# Allegro board TinyBMS-4.brd
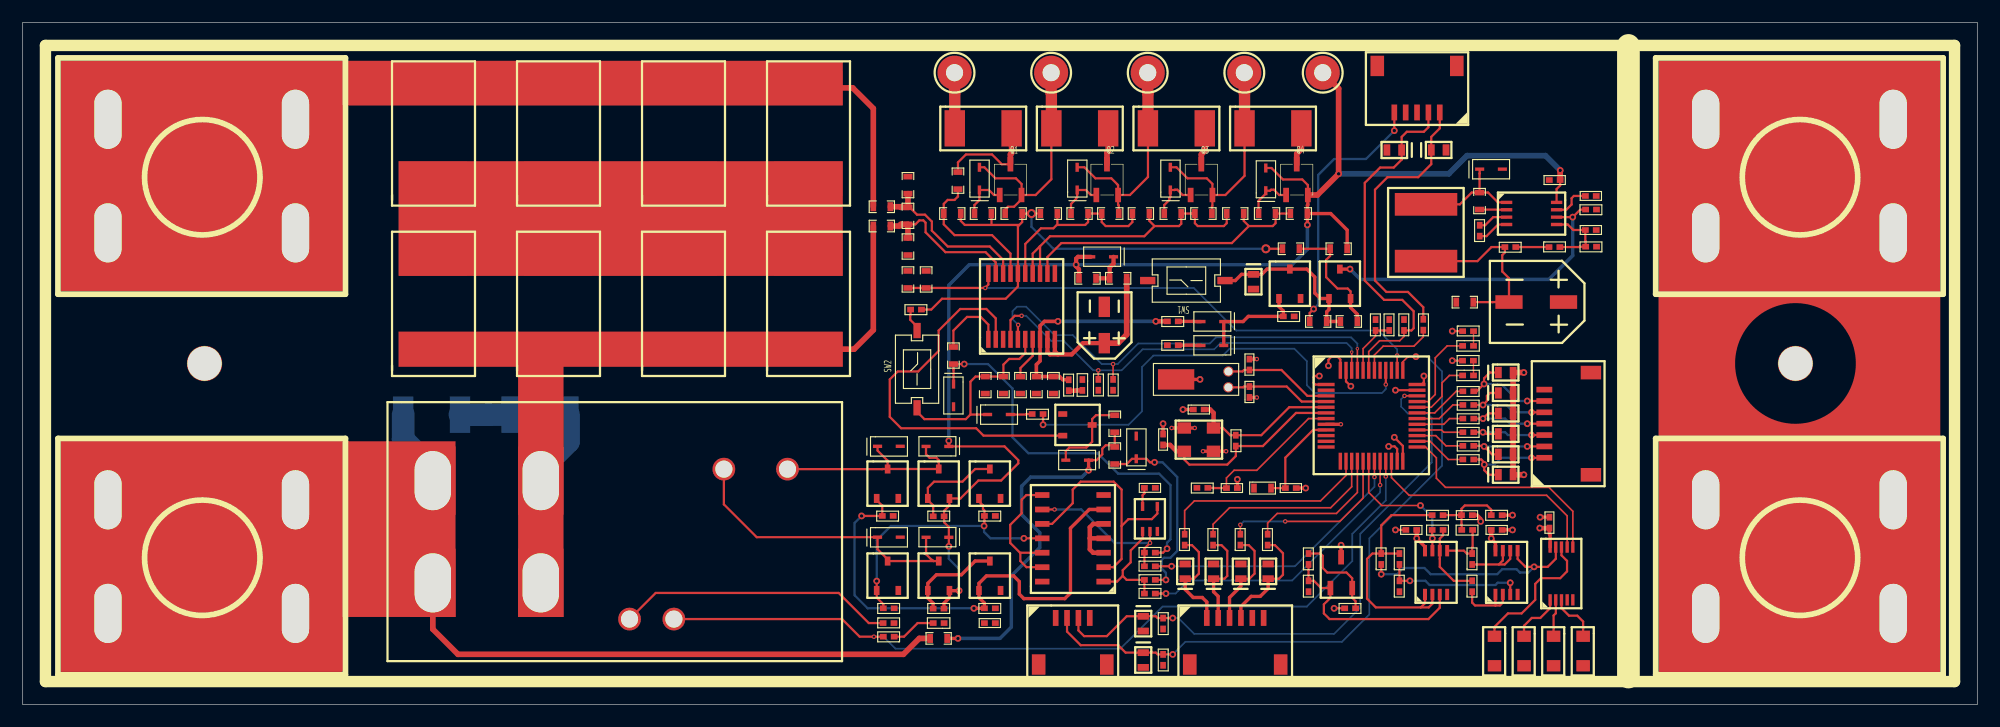
[diagram p0: board, top side]
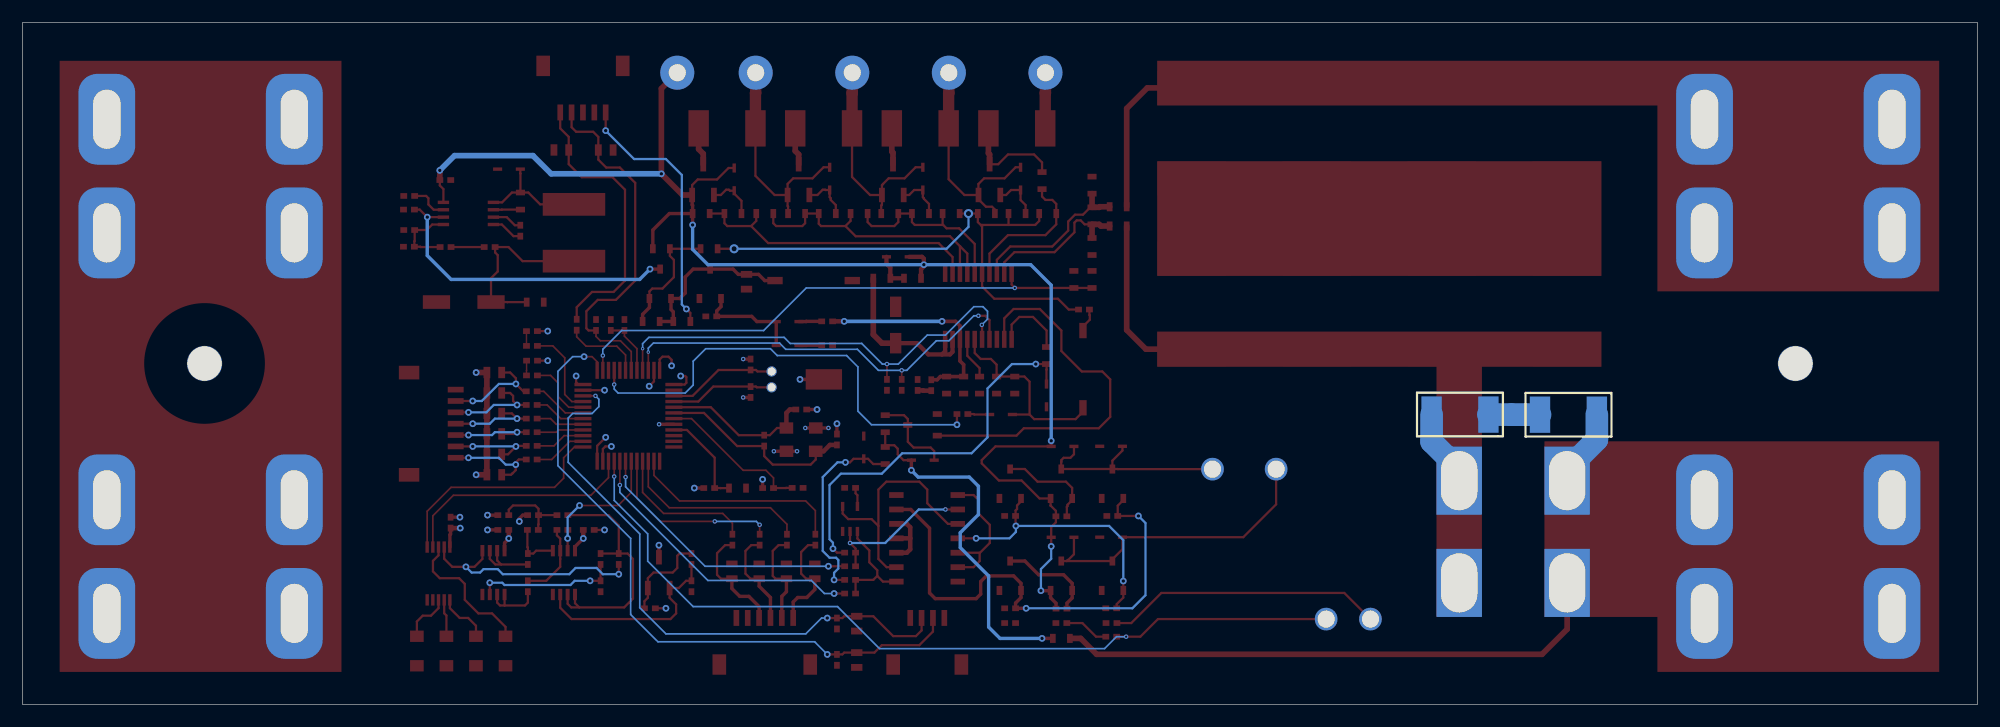
[diagram p1: board, bottom side, seen from below]

Outline 172 x 60 mm; copper layers: TOP, BOTTOM. Coordinates in mm from the lower left corner of the outline.
Outline path: 0,60 0,0 172,0 172,60 0,60

## Design rules (mm)
constraint set DEFAULT: min track width 0.127

## Placement (name value [footprint] x y rotation side)
C1  0.1uF  [C0402]  135.31 46.4 180 top
C2  0.1uF  [C0603]  77.5 46.5 270 top
C3  0.1uF  [C0402]  137.5 44.5 0 top
C4  0.1uF  [C0603]  127.8 45.1 270 top
C5  1uF  [C0603]  82.6 43.6 180 top
C6  1uF  [C0603]  91.1 43.6 180 top
C7  1uF  [C0603]  99.2 43.6 180 top
C8  1uF  [C0603]  107.5 43.6 180 top
C9  0.1uF  [C0603]  77.5 43.8 270 top
C10  0.1uF  [C0402]  137.5 41.5 0 top
C11  0.1uF  [C0603]  77.5 41.1 270 top
C12  470pF  [C0603]  79.9 36.6 90 top
C13  100uF/16V  [SMD-CAP-D6D3XL5D4MM]  133.2 35.4 180 top
C14  10uF/35V  [SMD-CAP-D4XL5D4MM]  95.2 33.4 90 top
C15  12pF  [C0402]  107.7 30.4 270 top
C16  470pF  [C0603]  84.3 28.9 270 top
C17  1uF/16V  [C0603]  87.4 28.9 270 top
C18  10uF/6.3V  [C0603]  88.8 28.9 270 top
C19  12pF  [C0402]  108.2 27 90 top
C20  12pF  [C0402]  103 25.7 0 top
C21  12pF  [C0402]  100.1 23.8 270 top
C22  0.1uF  [C0402]  98.7 18.8 0 top
C23  0.1uF  [C0402]  106.9 19.28 180 top
C24  0.1uF  [C0402]  111.1 18.78 0 top
C25  0.1uF  [C0402]  126.6 16.4 0 top
C26  0.1uF  [C0402]  134.6 15.5 90 top
C27  0.1uF  [C0402]  121.7 15.1 0 top
C28  0.1uF  [C0402]  130.2 15.6 180 top
C29  0.1uF  [C0402]  85.6 7.4 180 top
C30  DNP  [R2512]  36 25.5 180 bottom
D1  LTVS16H5.0T5G  [DFN1610-2]  120.7 48.8 180 top
D2  LTVS16H5.0T5G  [DFN1610-2]  124.6 48.79 0 top
D3  NSR0340HT1G  [SOD-323]  129.2 47.1 0 top
D4  SD05-7  [SOD-323]  84.2 46.26 90 top
D5  SD05-7  [SOD-323]  92.8 46.26 90 top
D6  SD05-7  [SOD-323]  101 46.26 90 top
D7  SD05-7  [SOD-323]  109.4 46.2 90 top
D8  1N4148WS  [SOD-323]  95 39.4 180 top
D9  LTVS16H5.0T5G  [DFN1610-2]  108.3 37.2 270 top
D10  1N4148WS  [SOD-323]  104.7 33.7 180 top
D11  1N4148WS  [SOD-323]  104.7 31.6 180 top
D12  LED  [LED0402]  126.7 31.3 0 top
D13  LTVS16H5.0T5G  [DFN1610-2]  130.5 29.2 0 top
D14  LED  [LED0402]  126.7 28.7 0 top
D15  LED  [LED0402]  93 28.6 270 top
D16  LTVS16H5.0T5G  [DFN1610-2]  130.5 27.4 0 top
D17  MM3Z4V7T1G  [SOD-323]  81.9 27.2 270 top
D18  LTVS16H5.0T5G  [DFN1610-2]  130.5 25.6 0 top
D19  1N4148WS  [SOD-323]  85.9 25.5 0 top
D20  LTVS16H5.0T5G  [DFN1610-2]  130.5 23.8 0 top
D21  1N4148WS  [SOD-323]  76.22 22.7 0 top
D22  1N4148WS  [SOD-323]  80.5 22.71 180 top
D23  MM3Z4V7T1G  [SOD-323]  98 22.6 90 top
D24  LTVS16H5.0T5G  [DFN1610-2]  130.5 22 0 top
D25  1N4148WS  [SOD-323]  92.8 21.5 180 top
D26  LTVS16H5.0T5G  [DFN1610-2]  130.5 20.2 0 top
D27  1N4148WS  [SOD-323]  76.22 14.7 0 top
D28  1N4148WS  [SOD-323]  80.5 14.71 180 top
D29  LTVS16H5.0T5G  [DFN1610-2]  102.3 11.7 90 top
D30  LTVS16H5.0T5G  [DFN1610-2]  104.8 11.7 90 top
D31  LTVS16H5.0T5G  [DFN1610-2]  107.2 11.7 90 top
D32  LTVS16H5.0T5G  [DFN1610-2]  109.6 11.7 90 top
D33  LED  [LED0402]  81.09 7.4 180 top
D34  LTVS16H5.0T5G  [DFN1610-2]  98.6 7.1 270 top
D35  LTVS16H5.0T5G  [DFN1610-2]  98.6 3.9 270 top
J1  Header1x5  [SMD-HOR-SH1D0-5P]  124.7 52.1 180 top
J2  -  [MFX04645]  7.5 51.5 0 top
J3  -  [MFX04645]  148.1 51.5 0 top
J4  Header1x7  [SMD-HOR-SH1D0-7P]  133.9 21.7 90 top
J5  -  [MFX04645]  7.5 18 0 top
J6  -  [MFX04645]  148.1 18 0 top
J7  Header1x4  [SMD-HOR-SH1D0-4P]  90.9 7.6 0 top
J8  Header1x6  [SMD-HOR-SH1D0-6P]  104.2 7.6 0 top
L1  CD54/68uH  [SMD-IND-6X6X4D4MM]  123.5 41.6 270 top
L2  4.7uH  [L0603]  108.3 18.63 0 top
NOREF  -  [unnamed]  16 30 0 top
NOREF#2  -  [#2]  57.35 20.71 0 top
NOREF#3  -  [#2]  36.09 10.69 90 top
NOREF#4  -  [#2]  69.33 4.2 90 top
NOREF#5  -  [#2]  16 30 0 top
NOREF#6  -  [#2]  45.55 9.86 0 top
NOREF#7  -  [#2]  61.65 20.71 0 top
NOREF#8  -  [#2]  36.09 19.69 0 top
NOREF#9  -  [unnamed]  156 30 0 top
NOREF#10  -  [#2]  69.3 7.45 90 top
NOREF#11  -  [#2]  32.5 9.86 0 top
NOREF#12  -  [#2]  36.05 9.86 0 top
NOREF#13  -  [#2]  53.35 9.86 0 top
Q1  FH3400C  [SOT-23-3]  85.5 44.4 0 top
Q2  FH3400C  [SOT-23-3]  94 44.4 0 top
Q3  FH3400C  [SOT-23-3]  102.3 44.4 0 top
Q4  FH3400C  [SOT-23-3]  110.7 44.4 0 top
Q5  FH3400C  [SOT-23]  111.5 37 0 top
Q6  FH3415C+  [SOT-23]  115.9 37 0 top
Q7  FH3415C+  [SOT-23]  92.8 24.6 270 top
Q8  FH3400C  [SOT-23]  76.1 19.4 0 top
Q9  FH3415C+  [SOT-23]  80.6 19.4 0 top
Q10  FH3400C  [SOT-23]  85.1 19.4 0 top
Q11  FH3400C  [SOT-23]  76.1 11.3 0 top
Q12  FH3415C+  [SOT-23]  80.6 11.3 0 top
Q13  FH3400C  [SOT-23]  85.1 11.3 0 top
R1  39  [R2512]  84.5 50.7 0 top
R2  39  [R2512]  93 50.7 0 top
R3  39  [R2512]  101.5 50.7 0 top
R4  39  [R2512]  110 50.7 0 top
R5  3mR/5W  [LVS3920-1050]  36.1 50.2 90 top
R6  3mR/5W  [LVS3920-1050]  47.1 50.2 90 top
R7  3mR/5W  [LVS3920-1050]  58.1 50.2 90 top
R8  3mR/5W  [LVS3920-1050]  69.1 50.2 90 top
R9  1K  [R0603]  81.9 46.9 270 top
R10  100  [R0603]  74.8 43.4 0 top
R11  100K  [R0402]  138.5 43.8 180 top
R12  10K  [R0603]  83.7 42.8 0 top
R13  1K  [R0603]  86.4 42.8 0 top
R14  10K  [R0603]  92.2 42.8 0 top
R15  1K  [R0603]  96.5 43.6 180 top
R16  10K  [R0603]  100.4 42.8 0 top
R17  1K  [R0603]  104.7 43.6 180 top
R18  10K  [R0603]  108.7 42.8 0 top
R19  1K  [R0603]  113.1 43.6 180 top
R20  100  [R0603]  74.8 41.7 0 top
R21  100K  [R0402]  128.47 41.2 90 top
R22  1K  [R0402]  134.3 40 0 top
R23  10K  [R0402]  138.5 40.53 180 top
R24  2K  [R0402]  131.4 40.5 180 top
R25  0  [R0603]  112.4 40.5 180 top
R26  DNP  [R0603]  115 39.7 0 top
R27  1K  [R0603]  92.9 37.1 0 top
R28  100  [R0603]  95.6 37.1 0 top
R29  1M  [R0603]  77.5 38.2 270 top
R30  0  [R0603]  126.1 35 0 top
R31  3mR/5W  [LVS3920-1050]  36.1 35.2 90 top
R32  3mR/5W  [LVS3920-1050]  47.1 35.2 90 top
R33  3mR/5W  [LVS3920-1050]  58.1 35.2 90 top
R34  3mR/5W  [LVS3920-1050]  69.1 35.2 90 top
R35  10K  [R0402]  79.1 35 180 top
R36  100K  [R0402]  111.9 34.4 180 top
R37  100  [R0603]  114.8 34.1 180 top
R38  100K  [R0603]  115.9 33.3 0 top
R39  DNP  [R0402]  101.7 33.96 180 top
R40  0  [R0402]  119.3 32.9 90 top
R41  DNP  [R0402]  120.5 32.9 90 top
R42  10K  [R0402]  121.8 32.9 90 top
R43  1K  [R0402]  123 33.9 270 top
R44  2K  [R0402]  126.7 32.6 0 top
R45  100  [R0402]  101.7 31.86 180 top
R46  2.2K  [R0603]  82.3 29.9 90 top
R47  2K  [R0402]  126.69 30 0 top
R48  10K  [R0402]  94.4 28.61 270 top
R49  10K  [R0402]  95.7 28.61 270 top
R50  DNP  [R0603]  91.1 27.3 90 top
R51  2K  [R0402]  92.3 27.6 90 top
R52  1K  [R0402]  127.7 27.8 180 top
R53  1K  [R0402]  127.7 26.6 180 top
R54  10K  [R0402]  89.8 25.8 180 top
R55  1K  [R0402]  127.7 25.4 180 top
R56  1M  [R0603]  96.5 23.9 90 top
R57  1K  [R0402]  127.7 24.2 180 top
R58  1M  [R0402]  106.5 23.7 270 top
R59  1K  [R0402]  127.7 23 180 top
R60  2.2K  [R0603]  96.5 21.1 90 top
R61  1K  [R0402]  127.7 21.8 180 top
R62  10K  [R0402]  104.3 19.3 180 top
R63  15.1K  [R0402]  125 16.9 180 top
R64  15.1K  [R0402]  130.2 16.9 180 top
R65  100K  [R0402]  76.61 16.83 180 top
R66  47K  [R0402]  80.11 16.3 0 top
R67  100K  [R0402]  85.6 16.83 180 top
R68  237K  [R0402]  125 15.6 180 top
R69  237K  [R0402]  127.6 15.6 180 top
R70  1K  [R0402]  102.5 14 90 top
R71  1K  [R0402]  105 14 90 top
R72  1K  [R0402]  107.4 14 90 top
R73  1K  [R0402]  109.8 14 90 top
R74  DNP  [R0402]  98.7 13.1 0 top
R75  0  [R0402]  113.4 12.3 90 top
R76  2.15K  [R0402]  119.8 12.3 90 top
R77  2.15K  [R0402]  121.4 12.3 90 top
R78  10K  [R0402]  127.8 12.3 90 top
R79  1K  [R0402]  98.7 11.9 0 top
R80  DNP  [R0402]  98.7 10.7 0 top
R81  DNP  [R0402]  113.4 9.9 90 top
R82  100  [R0402]  121.4 9.9 90 top
R83  10K  [R0402]  127.8 9.9 90 top
R84  1K  [R0402]  98.7 9.5 0 top
R85  100K  [R0402]  76.7 8.7 180 top
R86  47K  [R0402]  80.1 8.17 0 top
R87  100K  [R0402]  85.6 8.7 180 top
R88  365  [R0402]  117.3 8.7 180 top
R89  0  [R0402]  75.7 6.9 0 top
R90  10K  [R0402]  100.1 7.6 270 top
R91  2K  [R0402]  76.7 6.2 180 top
R92  1M  [R0603]  79.8 5.4 0 top
R93  PT100  [R1210]  129.5 4.7 270 top
R94  PT100  [R1210]  132.1 4.7 270 top
R95  PT100  [R1210]  134.7 4.7 270 top
R96  PT100  [R1210]  137.3 4.7 270 top
R97  10K  [R0402]  100.1 4.4 270 top
R98  DNP  [R2512]  45.5 25.5 0 bottom
RL1  -  [HF197F-110]  52.1 15.2 0 top
RV1  10K  [R0603]  85.9 28.9 270 top
SW1  BUTTON  [SW-SMD-3D0X6D0-2P]  102.4 37.3 180 top
SW2  BUTTON  [SW-SMD-3D0X6D0-2P]  78.7 29.5 90 top
TP1  BAT-  [TP_THR_CIR_3D0_1D5]  82 55.6 0 top
TP2  SOLDERING  [TP_THR_CIR_3D0_1D5]  90.5 55.6 0 top
TP3  SOLDERING  [TP_THR_CIR_3D0_1D5]  99 55.6 0 top
TP4  SOLDERING  [TP_THR_CIR_3D0_1D5]  107.5 55.6 0 top
TP5  BAT+  [TP_THR_CIR_3D0_1D5]  114.4 55.6 0 top
U1  LM5007MM  [VSSOP-8]  132.8 43.2 270 top
U2  BQ7692003PWR  [TSSOP-20]  87.9 35 90 top
U3  STM32F103CBT6  [LQFP-48]  118.7 25.4 270 top
U4  SN74AUP1G00DCKR  [SC-70-5]  99.19 16.3 0 top
U5  SN74F00DR  [SOIC-14]  95.52 10.2 90 top
U6  TL431  [SOT-23-3-TL431]  114.6 9.8 0 top
U7  XLV358-MS  [MSOP-8]  123.4 13.28 0 top
U8  XLV358-MS  [MSOP-8]  129.6 13.28 0 top
U9  RS2255XN  [MSOP-10]  135.4 11.5 0 top
Y1  32.768KHz  [DT-26]  106.1 29.3 270 top
Y2  8MHz  [SMD3225-4P]  103.5 23.3 0 top

## Library data of the parts
C1-C13 C15-C30 = CAP NP
C14 = CAP POL
D1 D2 D9 D13 D16 D18 D20 D24 D26 D29-D32 D34 D35 = DIODE TVS
D3 D8 D10 D11 D19 D21 D22 D25 D27 D28 = DIODE
D4-D7 = DIODE SCHOTTKY
D12 D14 D15 D33 = LED
D17 D23 = DIODE ZENER
J1 = Header1x5
J2 J3 J5 J6 = MFX04645
J4 = Header1x7
J7 = Header1x4
J8 = Header1x6
L1 L2 = INDUCTOR
Q1-Q4 Q6 Q7 Q9 Q12 = BSS84
Q5 Q8 Q10 Q11 Q13 = FH3400C
R1-R98 = R
RL1 = Relay
RV1 = VARISTOR
SW1 SW2 = SW PUSHBUTTON
TP1-TP5 = T POINT F
U1 = LM5007MM
U2 = BQ7692003PWR
U3 = STM32F103CBT6
U4 = SN74AUP1G00DCKR
U5 = SN74F00DR
U6 = TL431/TI
U7 U8 = XLV358-MS
U9 = RS2255XN
Y1 = CRYSTAL-2P
Y2 = CRYSTAL

## Footprints (pads in the part's own frame, mm; a bottom-side part is the same pattern mirrored in y, then rotated)
C0402
  rect 0.6x0.5 smd: 1(0.01,0.25) 2(0.97,0.25)
C0603
  rect 0.5x0.8 smd: 1(0.05,0.4) 2(1.55,0.4)
DFN1610-2
  rect 0.6x1 smd: 1(-0.647,0.006) 2(0.653,0.006)
DT-26
  round 0.9 hole 0.7: 1(0,0) 2(1.4,0)
  rect 1.8x3.2 smd: 3(0.7,-4.6)
HF197F-110
  round 2 hole 1.5: 1(9.6,5.5) 2(15.2,5.5) 7(1.3,-7.7) 8(5.2,-7.7)
  rect 4x6 hole 3.2x5.2: 3(-6.51,4.488) 4(-6.51,-4.512) 5(-16.01,4.488) 6(-16.01,-4.512)
L0603
  rect 0.5x0.8 smd: 1(0.05,0.4) 2(1.55,0.4)
LED0402
  rect 0.6x0.5 smd: 1(0.01,0.25) 2(0.97,0.25)
LQFP-48
  rect 0.3x1.5 smd: 1(-2.75,-4) 2(-2.25,-4) 3(-1.75,-4) 4(-1.25,-4) 5(-0.75,-4) 6(-0.25,-4) 7(0.25,-4) 8(0.75,-4) 9(1.25,-4) 10(1.75,-4) 11(2.25,-4) 12(2.75,-4) 25(2.75,4) 26(2.25,4) 27(1.75,4) 28(1.25,4) 29(0.75,4) 30(0.25,4) 31(-0.25,4) 32(-0.75,4) 33(-1.25,4) 34(-1.75,4) 35(-2.25,4) 36(-2.75,4)
  rect 1.5x0.3 smd: 13(4,-2.75) 14(4,-2.25) 15(4,-1.75) 16(4,-1.25) 17(4,-0.75) 18(4,-0.25) 19(4,0.25) 20(4,0.75) 21(4,1.25) 22(4,1.75) 23(4,2.25) 24(4,2.75) 37(-4,2.75) 38(-4,2.25) 39(-4,1.75) 40(-4,1.25) 41(-4,0.75) 42(-4,0.25) 43(-4,-0.25) 44(-4,-0.75) 45(-4,-1.25) 46(-4,-1.75) 47(-4,-2.25) 48(-4,-2.75)
LVS3920-1050
  rect 3x6 smd: 1(-3.94,-0.02) 2(4.06,-0.02)
MFX04645
  rrect 5x8 hole 2.4x5.2: 1(0,0) 2(16.5,0) 3(0,-10) 4(16.5,-10)
MSOP-8
  rect 0.35x1 smd: 1(-0.001,-3.615) 2(0.649,-3.615) 3(1.299,-3.615) 4(1.949,-3.615) 5(1.949,0.241) 6(1.299,0.241) 7(0.649,0.241) 8(-0.001,0.241)
MSOP-10
  rect 0.3x1 smd: 1(-0.99,-2.31) 2(-0.49,-2.31) 3(0.01,-2.31) 4(0.51,-2.31) 5(1.01,-2.31) 6(1.01,2.34) 7(0.51,2.34) 8(0.01,2.34) 9(-0.49,2.34) 10(-0.99,2.34)
R0402
  rect 0.6x0.5 smd: 1(0.01,0.25) 2(0.97,0.25)
R0603
  rect 0.5x0.8 smd: 1(0.05,0.4) 2(1.55,0.4)
R1210
  rect 1x1.2 smd: 1(-1.289,0.015) 2(1.311,0.015)
R2512
  rect 1.8x3.2 smd: 1(-2.48,-0.002) 2(2.52,-0.002)
SC-70-5
  rect 0.3x0.8 smd: 1(-0.646,-1.085) 2(0.004,-1.085) 3(0.654,-1.085) 4(0.654,1.115) 5(-0.646,1.115)
SMD3225-4P
  rect 1.2x1 smd: 1(-1.285,-1.028) 2(1.29,-1.026) 3(1.297,1.021) 4(-1.29,1.023)
SMD-CAP-D4XL5D4MM
  rect 1.8x1 smd: 1(-1.61,0.02) 2(1.59,0.02)
SMD-CAP-D6D3XL5D4MM
  rect 2.4x1.2 smd: 1(-2.39,-0.01) 2(2.41,-0.01)
SMD-HOR-SH1D0-4P
  rect 0.5x1.4 smd: 1(0,0) 2(1,0) 3(2,0) 4(3,0)
  rect 1.2x1.8 smd: 5(4.5,-4.1) 6(-1.5,-4.1)
SMD-HOR-SH1D0-5P
  rect 0.5x1.4 smd: 1(0,0) 2(1,0) 3(2,0) 4(3,0) 5(4,0)
  rect 1.2x1.8 smd: 6(5.5,-4.1) 7(-1.5,-4.1)
SMD-HOR-SH1D0-6P
  rect 0.5x1.4 smd: 1(0,0) 2(1,0) 3(2,0) 4(3,0) 5(4,0) 6(5,0)
  rect 1.2x1.8 smd: 7(6.5,-4.1) 8(-1.5,-4.1)
SMD-HOR-SH1D0-7P
  rect 0.5x1.4 smd: 1(0,0) 2(1,0) 3(2,0) 4(3,0) 5(4,0) 6(5,0) 7(6,0)
  rect 1.2x1.8 smd: 8(-1.5,-4.1) 9(7.5,-4.1)
SMD-IND-6X6X4D4MM
  rect 2x5.5 smd: 1(-2.41,-0.01) 2(2.59,-0.01)
SOD-323
  rect 0.8x0.3 smd: 1(-0.99,0.01) 2(1.01,0.01)
SOIC-14
  rect 0.51x1.27 smd: 1(0.6,0.4) 2(1.87,0.4) 3(3.14,0.4) 4(4.41,0.4) 5(5.68,0.4) 6(6.95,0.4) 7(8.22,0.4) 8(8.22,5.8) 9(6.95,5.8) 10(5.68,5.8) 11(4.41,5.8) 12(3.14,5.8) 13(1.87,5.8) 14(0.6,5.8)
SOT-23
  rect 0.5x0.8 smd: 1(-0.95,-1.28) 2(0.95,-1.28) 3(0.01,1.31)
SOT-23-3
  rect 0.51x1.27 smd: 1(0.476,0.434) 2(2.391,0.434) 3(1.415,3.142)
SOT-23-3-TL431
  rect 0.51x1.27 smd: 1(0.476,0.434) 2(1.415,3.142) 3(2.391,0.434)
SW-SMD-3D0X6D0-2P
  rect 1.35x0.65 smd: 1(-3.4,0) 2(3.4,0)
TP_THR_CIR_3D0_1D5
  round 3 hole 1.5: 1(0,0)
TSSOP-20
  rect 1.5x0.4 smd: 1(-2.872,2.924) 2(-2.872,2.274) 3(-2.872,1.624) 4(-2.872,0.974) 5(-2.872,0.324) 6(-2.872,-0.326) 7(-2.872,-0.976) 8(-2.872,-1.626) 9(-2.872,-2.276) 10(-2.872,-2.926) 11(2.928,-2.926) 12(2.928,-2.276) 13(2.928,-1.626) 14(2.928,-0.976) 15(2.928,-0.326) 16(2.928,0.324) 17(2.928,0.974) 18(2.928,1.624) 19(2.928,2.274) 20(2.928,2.924)
unnamed
  round 3.1 hole 3 unplated: (0,0)
VSSOP-8
  rect 0.3x1 smd: 1(-0.985,-2.22) 2(-0.335,-2.22) 3(0.315,-2.22) 4(0.965,-2.22) 5(0.965,2.18) 6(0.315,2.18) 7(-0.335,2.18) 8(-0.985,2.18)

## Nets
GND: C1.2 C2.1 C3.2 C10.2 C11.2 C12.2 C13.1 C14.2 C15.1 C16.2 C17.2 C18.2 C19.1 C20.1 C21.1 C22.2 C23.1 C24.2 C25.2 C26.2 C27.1 C28.1 C29.2 D1.2 D2.2 D3.2 D9.2 D13.2 D15.1(CATHODE) D16.2 D17.2 D18.2 D20.2 D21.2 D23.2 D24.2 D26.2 D27.2 D29.2 D30.2 D31.2 D32.2 D33.1(CATHODE) D34.2 D35.2 J1.3 J1.4 J1.6 J1.7 J2.1 J2.2 J2.3 J2.4 J4.7 J4.8 J4.9 J7.4 J7.5 J7.6 J8.5 J8.7 J8.8 Q5.2(S) Q7.1 Q8.2(S) Q10.2(S) Q11.2(S) Q13.2(S) R1.1 R5.2 R6.2 R7.2 R8.2 R10.1 R11.1 R21.1 R23.1 R29.1 R36.1 R40.2 R64.1 R65.1 R67.1 R81.1 R82.1 R85.1 R87.1 R93.2 R94.2 R95.2 R96.2 RV1.2 SW1.2 TP1.1(TP) U1.4 U2.3(VSS) U3.8 U3.23 U3.35 U3.47(VSS_3) U4.3 U5.7 U6.2 U7.4 U8.4 U9.4 U9.5 Y1.3 Y2.2 Y2.4
VDD25: R63.2 R76.2 R77.2 U7.1 U7.2
VDD33: C22.1 C26.1 C27.2 C28.2 C29.1 J7.1 L2.1 R30.1 R41.2 R42.2 R44.1 R47.1 R48.2 R49.2 R50.1 R62.2 R88.2 R89.2 R90.2 R97.2 U3.1 U3.24 U3.36 U3.48 U4.5 U5.14(VCC) U7.8 U8.8 U9.10
VDD168: C1.1 D7.2(CATHODE) D8.2 D22.1(K) D28.1(K) J3.1 J3.2 J3.3 J3.4 J6.1 J6.2 J6.3 J6.4 Q4.2(S) Q9.2(S) Q12.2(S) R19.1 R26.2 R27.1 R66.2 R86.2 TP5.1(TP) U1.8(VIN)
ADC1_IN8: R68.2 U3.18 U7.7(OUTB)
BMS_ALERT: C12.1 R29.2 U2.20 U3.38
BMS_ON: R54.1 U3.40
CHG: D23.1(CATHODE) R60.1 R80.2
CTL1: R84.2 U3.20
CTL2: R79.2 U3.19
DSG: D17.1(CATHODE) R46.1 R74.2
EXT_EN: J1.5 R37.2
HCTL1: Q8.1 Q13.1 R65.2 R87.2 U5.6
HCTL2: Q10.1 Q11.1 R67.2 R85.2 U5.11
I2C1_SCL: R49.1 U2.5 U3.45
I2C1_SDA: R48.1 U2.4 U3.46
LED0: D14.1(CATHODE) U3.32
LED1: D12.1(CATHODE) U3.33
MCU_EN: R45.2
MCU_HOLD: U3.39
REGOUT: C18.1 R39.2 R50.2 R51.2 U2.8
REL: R91.2 RL1.8 U3.21
SELA: U3.22 U9.7
SELB: U3.25 U9.6
SPI1_MISO: R73.2 U3.16
SPI1_MOSI: R72.2 U3.17
SPI1_NSS: R70.2 U3.14
SPI1_SCK: R71.2 U3.15
SWCLK: D35.1(CATHODE) J7.2 R97.1 U3.37
SWDIO: D34.1(CATHODE) J7.3 R90.1 U3.34
TIM1_CH1: R55.2 U3.29
TIM1_CH1N: R61.2 U3.26
TIM1_CH2: R53.2 U3.30
TIM1_CH2N: R59.2 U3.27
TIM1_CH3: R52.2 U3.31
TIM1_CH3N: R57.2 U3.28
USART1_RX: D1.1(CATHODE) J1.2 R42.1 U3.43
USART1_TX: R43.2 U3.42
USART2_RX: U3.13
USART2_TX: U3.12
VC1: C5.1 C6.2 R12.2 R13.2 R25.2 R35.1 U2.16
WAKE_UP: C16.1 D19.1(K) RV1.1 SW2.1 U2.6
N00153: C7.1 C8.2 R16.2 R17.2 U2.13 U2.14
N01121: D6.2(CATHODE) Q3.2(S) R4.1 R17.1 TP4.1(TP)
N02162: C2.2 C9.1 R10.2 U2.18
N02176: C9.2 C11.1 R20.2 U2.19
N02237: R20.1 R31.1 R32.1 R33.1 R34.1 R98.2 RL1.3 RL1.4
N02763: D25.1(K) R56.1 R60.2 R92.2
N03241: Q7.2(S) U2.2
N04366: R46.2 U2.1
N05476: C14.1 R28.2 U2.9 U2.10
N06945: D8.1(K) R27.2 R28.1
N07349: C17.1 U2.7
N45632: D19.2 R54.2
N60275: C4.2 U1.2
N60407: C4.1 D3.1(K) L1.1 U1.1
N60487: C13.2 L1.2 R24.2 R30.2
N60523: C3.1 U1.7
N60535: R21.2 U1.3
N60543: C10.1 R22.2 R23.2 U1.5
N60675: R22.1 R24.1
N62346: R40.1 R41.1 U3.44
N62530: C21.2 R58.2 U3.6 Y2.1
N62534: C20.2 R58.1 U3.5 Y2.3
N62538: C19.2 U3.4 Y1.2
N62542: C15.2 U3.3 Y1.1
N62840: C23.2 R62.1 U3.7
N62876: C24.1 L2.2 U3.9
N66854: D27.1(K) D28.2 Q11.3 Q12.3 RL1.1
N66902: Q12.1 Q13.3 R86.1
N72236: D21.1(K) D22.2 Q8.3 Q9.3 RL1.2
N76887: Q9.1 Q10.3 R66.1
N86420: D29.1(CATHODE) J8.1 R70.1
N86427: D30.1(CATHODE) J8.2(WR) R71.1
N86434: D31.1(CATHODE) J8.3 R72.1
N86441: D32.1(CATHODE) J8.4 R73.1
N86910: D14.2 R47.2
N86956: D12.2 R44.2
N90859: R75.2 R88.1 U6.3
N95637: R75.1 R81.2 U6.1(REF) U7.3
N97042: R77.1 R82.2 U8.3
N97046: R76.1 U8.5 U9.9
N98736: R68.1 R83.2 U7.6
N98835: R69.1 R78.2 U7.5
N100399: R78.1 U8.6 U8.7(OUTB)
N101244: R83.1 U8.1 U8.2
N105903: R93.1 U9.8
N105907: R96.1 U9.3
N105911: R94.1 U9.1
N105915: R95.1 U9.2(X3)
N115788: C25.1 R63.1 R64.2 R69.2
N129705: D25.2 Q7.3 R56.2
N129935: C30.2 J5.1 J5.2 J5.3 J5.4 R92.1 RL1.5 RL1.6
N130360: C30.1 R98.1
N133152: U5.3 U5.4 U5.5
N133196: U5.8 U5.12 U5.13
N137595: U4.4(Y) U5.2 U5.10
N137612: R80.1 R84.1 U4.1 U5.1
N137616: R74.1 R79.1 U4.2 U5.9
N140319: Q4.3 R4.2
N140441: C8.1 R18.2 R19.2 U2.12
N140869: D7.1 Q4.1 R18.1
N142766: Q3.3 R3.2
N142773: D5.2(CATHODE) Q2.2(S) R3.1 R15.1 TP3.1(TP)
N142879: D6.1 Q3.1 R16.1
N143225: D5.1 Q2.1 R14.1
N143454: C6.1 C7.2 R14.2 R15.2 U2.15
N144047: Q2.3 R2.2
N144054: D4.2(CATHODE) Q1.2(S) R2.1 R13.1 TP2.1(TP)
N144202: D4.1 Q1.1 R12.1
N144572: Q1.3 R1.2 R9.1
N144615: C5.2 R9.2 U2.17
N146314: R35.2 SW2.2
N155464: D9.1(CATHODE) Q5.3 Q6.1 R37.1 R38.1 SW1.1
N155472: Q6.3 R11.2 U1.6
N155484: Q6.2(S) R25.1 R26.1 R38.2
N160866: D10.1(K) D11.1(K) Q5.1 R36.2
N160870: D11.2 R45.1
N160997: D10.2 R39.1
N162969: D15.2 R51.1
N169622: D2.1(CATHODE) J1.1 R43.1
N232879: R5.1 R6.1 R7.1 R8.1 R31.2 R32.2 R33.2 R34.2
N240697: D33.2 R91.1
N241926: R89.1 RL1.7
N244503: D26.1(CATHODE) J4.1 R61.1
N244510: D24.1(CATHODE) J4.2 R59.1
N244517: D20.1(CATHODE) J4.3 R57.1
N244530: D18.1(CATHODE) J4.4 R55.1
N244543: D16.1(CATHODE) J4.5 R53.1
N244556: D13.1(CATHODE) J4.6 R52.1

Pads without a net: J8 6; U2 11; U3 2 10 11 41

## Via types
v1: diameter 0.4, hole 0.2, TOP to BOTTOM, 23 vias
v2: diameter 0.6, hole 0.3, TOP to BOTTOM, 74 vias
v3: diameter 0.3, hole 0.15, TOP to BOTTOM, 2 vias
v4: diameter 0.8, hole 0.45, TOP to BOTTOM, 2 vias

## Routing (per net, layer and track width the routed paths; a pad name or vN(x,y) marks a point on that pad's centre or on a via; arc(x,y) is an arc through that point)
GND: length 57
  TOP w0.2: R21.1 128.81,41.21 129.84,42.23 U1.4 ; v2(120.2,22.7) 120.73,22.7 120.95,22.48 U3.23 ; U3.35 v2(120.8,27.65) ; C27.1 v2(120.8,15.35) ; v2(116.87,28) 116.45,28.42 U3.47
  TOP w0.3: C23.1 v2(106.89,19.8) ; C19.1 v1(108.6,27.01) ; U6.2 v2(116.02,14) ; v1(105.9,22.27) Y2.2 v1(103.86,22.27) ; C21.1 v2(100.35,24.7) ; C28.1 v2(131.1,15.35) ; v2(128.3,16.1) 128.3,16.35 128,16.65 C25.2 ; U3.8 v1(116,24.65) ; v1(101.1,24.32) Y2.4 v1(103.14,24.32) ; C24.2 v2(112.9,19.03) ; C26.2 v2(133.53,16.47) ; C20.1 v2(102.1,25.95) ; R64.1 v2(131.1,16.65) ; v1(108.6,30.39) C15.1 ; Y1.3 v2(103.6,28.6)
  TOP w0.5: v2(132.1,29.21) D13.2 D16.2 D18.2 D20.2 D24.2 D26.2 v2(132.1,20.21) ; R10.1 74.85,52.45 73.04,54.26 R8.2
  TOP w1: R1.1 82.02,53.8 82,53.82 TP1.1
VDD25: length 22.2
  TOP w0.2: 123.03,8.53 123.73,8.53 124.05,8.85 U7.2 ; 123.03,8.53 119.07,8.53 118.3,9.3 118.3,12.8 118.77,13.27 R76.2 ; 123.03,8.53 123.4,8.9 U7.1 ; R76.2 R77.2 ; R76.2 119.55,15.75 120.45,16.65 R63.2
VDD33: length 19.7
  TOP w0.2: U4.5 98.55,18.41 98.71,18.57 C22.1 ; U3.36 123.1,28.15 123.3,28.35 v2(123.3,28.9) ; v2(114.9,29.8) 114.9,30.33 115.17,30.6 115.7,30.6 115.95,30.35 U3.48 ; R88.2 v2(115.4,8.45) ; v2(120.7,23.5) 121.45,22.75 U3.24 ; R44.1 v2(125.8,32.85) ; U3.1 113.75,28.15 113.6,28.3 113.6,28.8 113.7,28.9 v2(114.1,28.9) ; R47.1 v2(125.8,30.25)
  TOP w0.3: v2(122.67,14.6) 123.4,13.87 U7.8 ; C26.1 134.35,14.98 134.41,14.92 U9.10 ; v2(129.23,14.6) 129.23,14.57 129.6,14.2 U8.8
  TOP w0.4: C28.2 v2(129.23,14.6) ; C27.2 v2(122.67,14.6) ; C26.1 v2(133.5,15.51)
VDD168: length 128.4
  TOP w0.2: 81.5,22.7 86.4,22.7 87.61,21.49 87.61,21.21 86.1,19.7 84.1,19.7 82.52,18.12 Q9.2 81.55,17.49 81.54,17.48 81.54,17.48 81.08,17.03 R66.2 81.08,16.02 81.5,15.6 v2(81.5,13.9) ; D7.2 109.89,47.21 110.9,46.2 112.6,46.2 113.09,45.71 Q4.2 ; U1.8 134.98,45.36 135.29,45.67 C1.1
  TOP w0.3: v2(113.05,42.2) R19.1 ; R19.1 113.05,43.93 113.09,43.97 Q4.2 ; R19.1 115.1,43.2 116.55,41.75 R26.2 ; v2(82.4,10) 81.57,10 Q12.2 81.55,9.38 81.07,8.9 R86.2 ; 81.5,22.7 v2(81.5,23.2)
  TOP w0.38: R27.1 92.95,38.3 92.7,38.55 v2(92.7,38.7) 92.7,39.23 92.86,39.39 D8.2
  TOP w0.5: Q4.2 113.93,44.83 v2(115.8,46.7) 115.8,54.2 TP5.1 ; v2(135.3,47) 135.29,46.99 C1.1
  BOTTOM w0.2: v2(81.5,13.9) 81.5,12.8 82.4,11.9 v2(82.4,10)
  BOTTOM w0.3: v2(113.05,42.2) 113.05,40.05 111.7,38.7 v2(92.7,38.7) 83.3,38.7 81.5,36.89 v2(81.5,23.2)
  BOTTOM w0.5: v2(115.8,46.7) 125.5,46.7 127.1,48.3 134,48.3 v2(135.3,47)
ADC1_IN8: length 12.9
  TOP w0.15: U3.18 118.45,18.65 119.6,17.5 v2(123,17.5)
  TOP w0.2: R68.2 124.03,14.87 124.05,14.85 v2(124.05,14.6) U7.7
  BOTTOM w0.2: v2(123,17.5) 124.05,16.45 v2(124.05,14.6)
BMS_ALERT: length 48.5
  TOP w0.15: v1(120.95,30.7) U3.38
  TOP w0.2: R29.2 C12.1 v1(84.7,36.65) 84.7,36.67 84.98,36.95 U2.20
  BOTTOM w0.15: v1(84.7,36.65) 103.05,36.65 106.8,32.9 119.3,32.9 120.95,31.25 v1(120.95,30.7)
BMS_ON: length 40.8
  TOP w0.2: v1(119.95,28.15) U3.40 ; R54.1 v2(89.79,24.61)
  BOTTOM w0.15: v1(119.95,28.15) 119.95,27.75 119.6,27.4 113.7,27.4 113,28.1 113,30.2 111.9,31.3 106.2,31.3 105.6,30.7 99.5,30.7 98.5,29.7 98.5,25.8 97.31,24.61 v2(89.79,24.61)
CHG: length 17.4
  TOP w0.2: v2(99.6,21.3) 99.2,21.3 98.89,21.61 D23.1 97.61,21.61 97.15,21.15 R60.1 ; R80.2 v2(100.6,10.95)
  BOTTOM w0.2: v2(99.6,21.3) 100.3,21.3 101.6,20 101.6,13.5 101,12.9 100.43,12.9 100.23,12.7 100.23,11.95 100.6,11.58 v2(100.6,10.95)
CTL1: length 26.2
  TOP w0.15: U3.20 v1(119.45,19.3)
  TOP w0.2: R84.2 v2(100.6,9.75)
  BOTTOM w0.15: v2(100.6,9.75) 101.45,9.75 102.6,10.9 111.7,10.9 119.45,18.65 v1(119.45,19.3)
CTL2: length 24.4
  TOP w0.15: U3.19 v1(118.95,20)
  TOP w0.2: R79.2 v2(101.1,12.15)
  BOTTOM w0.15: v1(118.95,20) 118.95,19.15 111.95,12.15 v2(101.1,12.15)
DSG: length 34.7
  TOP w0.2: v2(82.85,29.95) R46.1 81.9,29.47 81.91,29.46 D17.1 ; v2(100.7,13.7) 100.35,13.35 R74.2
  BOTTOM w0.2: v2(100.7,13.7) 100.7,14.23 101,14.53 101,19.3 100,20.3 96.4,20.3 94.6,22.1 88.5,22.1 87.1,23.5 87.1,27.8 84.95,29.95 v2(82.85,29.95)
EXT_EN: length 23.1
  TOP w0.2: R37.2 113.25,34.45 v2(113.6,34.8) ; v2(120.7,50.5) J1.5
  BOTTOM w0.2: v2(113.6,34.8) 114,35.2 114,46.6 115.4,48 118.2,48 v2(120.7,50.5)
HCTL1: length 44.4
  TOP w0.2: Q8.1 75.15,17.97 75.64,17.48 R65.2 v2(73.82,16.58)
  TOP w0.3: v2(83.7,8.45) R87.2 84.63,8.91 84.15,9.39 Q13.1 84.15,10.65 84.8,11.3 87.2,11.3 87.7,10.8 87.7,9.7 88.1,9.3 91.7,9.3 92.2,9.8 92.2,15.5 93.85,17.15 U5.6
  BOTTOM w0.2: v2(73.82,16.58) 73.2,15.96 73.2,9.6 74.35,8.45 v2(83.7,8.45)
HCTL2: length 24.7
  TOP w0.2: v2(75.15,10.85) Q11.1 75.15,9.39 75.73,8.81 R85.2 ; Q10.1 84.15,17.85 84.5,17.5 84.5,17.19 84.63,17.06 R67.2 84.63,15.73 v2(84.6,15.7) ; U5.11 v2(88.1,14.61)
  BOTTOM w0.2: v2(75.15,10.85) 75.15,14.45 76.4,15.7 v2(84.6,15.7) 84.6,15.17 85.16,14.61 v2(88.1,14.61)
I2C1_SCL: length 40.2
  TOP w0.15: R49.1 v1(95.95,29.95) ; U3.45 v3(117.45,31.3)
  TOP w0.2: U2.5 87.58,33.38 v1(87.6,33.4)
  BOTTOM w0.15: v3(117.45,31.3) 117.45,31.75 116.9,32.3 105,32.3 104.46,31.76 98.17,31.76 96.35,29.95 v1(95.95,29.95) 94.95,29.95 92.4,32.5 90.8,32.5 88.3,35 87.5,35 87.1,34.6 87.1,33.9 v1(87.6,33.4)
I2C1_SDA: length 37.8
  TOP w0.15: v1(94.65,29.4) R48.1 ; v3(116.95,31) U3.46
  TOP w0.2: U2.4 86.93,33.83 87.3,34.2 v1(87.9,34.2)
  BOTTOM w0.15: v3(116.95,31) 116.95,31.35 116.5,31.8 105.4,31.8 104.85,31.25 98.55,31.25 96.7,29.4 v1(94.65,29.4) 94.2,29.4 91.6,32 90.5,32 88.3,34.2 v1(87.9,34.2)
LED0: length 5.9
  TOP w0.15: D14.1 125.55,28.95 124.9,28.3 124.9,27.1 123.95,26.15 U3.32
LED1: length 7.9
  TOP w0.15: D12.1 125.35,31.55 124.3,30.5 124.3,27.27 123.68,26.65 U3.33
REGOUT: length 18.9
  TOP w0.32: R51.2 91.53,28.57 91.25,28.85 R50.2 C18.1 89.2,29.9 89.53,30.23 U2.8 89.53,33.33 89.91,33.71 v2(91.1,33.71)
  TOP w0.4: R39.2 v2(99.71,33.71)
  BOTTOM w0.32: v2(91.1,33.71) v2(99.71,33.71)
REL: length 74.8
  TOP w0.15: U3.21 v1(119.95,20.05)
  TOP w0.2: RL1.8 72.1,7.5 73.65,5.95 v1(74.9,5.95) R91.2
  BOTTOM w0.15: v1(119.95,20.05) 119.95,17.95 117,15 117,12.6 113,8.6 100.3,8.6 96.6,4.9 76.8,4.9 75.75,5.95 v1(74.9,5.95)
SELA: length 21.1
  TOP w0.15: U3.22 120.45,19.95 122,18.4 134.1,18.4 135.91,16.59 U9.7
SELB: length 20.3
  TOP w0.15: U9.6 136.41,16.99 134.3,19.1 125.2,19.1 124.4,19.9 124.4,21.7 123.45,22.65 U3.25
SPI1_MISO: length 12.7
  TOP w0.15: R73.2 109.55,15.95 110.4,16.8 115.6,16.8 117.45,18.65 U3.16
SPI1_MOSI: length 15.9
  TOP w0.15: v1(107.15,15.8) R72.2 ; v1(111.1,16.1) 115.9,16.1 117.95,18.15 U3.17
  BOTTOM w0.15: v1(107.15,15.8) 107.45,16.1 v1(111.1,16.1)
SPI1_NSS: length 18.8
  TOP w0.15: U3.14 116.45,20.15 114.2,17.9 103.1,17.9 102.25,17.05 R70.2
SPI1_SCK: length 16.7
  TOP w0.15: U3.15 116.95,19.15 115.1,17.3 106.2,17.3 104.75,15.85 R71.2
SWCLK: length 59.1
  TOP w0.15: U3.37 121.45,30.15 121.9,30.6 v2(122.6,30.6)
  TOP w0.2: J7.2 91.9,6.4 93.1,5.2 96.4,5.2 97.05,4.55 D35.1 99.72,4.55 99.87,4.39 R97.1 v2(101.2,4.39)
  BOTTOM w0.15: v2(101.2,4.39) 102.31,5.5 116.1,5.5 118.5,7.9 118.5,14.6 124.9,21 124.9,29.31 123.61,30.6 v2(122.6,30.6)
SWDIO: length 53
  TOP w0.15: U3.34 v1(121.6,27.15)
  TOP w0.2: J7.3 92.9,6.5 93.4,6 95.4,6 97.15,7.75 D34.1 99.72,7.75 99.87,7.59 R90.1 v2(101.2,7.59)
  BOTTOM w0.15: v2(101.2,7.59) 101.7,7.59 103.09,6.2 115.4,6.2 117.7,8.5 117.7,15 124,21.3 124,25.2 123.6,25.6 121.9,25.6 121.3,26.2 121.3,26.85 v1(121.6,27.15)
TIM1_CH1: length 4.2
  TOP w0.15: R55.2 125.55,25.15 125.05,24.65 U3.29
TIM1_CH1N: length 4.7
  TOP w0.15: R61.2 125.45,21.55 123.85,23.15 U3.26
TIM1_CH2: length 4.5
  TOP w0.15: R53.2 125.85,26.35 124.65,25.15 U3.30
TIM1_CH2N: length 4.4
  TOP w0.15: R59.2 125.25,22.75 124.35,23.65 U3.27
TIM1_CH3: length 4.8
  TOP w0.15: U3.31 124.25,25.65 126.15,27.55 R52.2
TIM1_CH3N: length 4.1
  TOP w0.15: R57.2 125.05,23.95 124.85,24.15 U3.28
USART1_RX: length 32.4
  TOP w0.15: R42.1 121.55,32.38 121.17,32 119.4,32 118.45,31.05 U3.43
  TOP w0.2: J1.2 123.7,50.8 123.3,50.4 121.8,50.4 121.35,49.95 D1.1 121.35,47.95 120.65,47.25 119.45,47.25 118.1,45.9 118.1,37.3 119.8,35.6 121.4,35.6 122.4,34.6 122.4,33.1 122.21,32.91 R42.1
USART1_TX: length 6.9
  TOP w0.15: U3.42 118.95,30.75 119.73,31.53 122.43,31.53 123.25,32.35 R43.2
VC1: length 48.5
  TOP w0.2: 85.25,42.2 87.6,42.2 87.6,42.1 ; 85.25,42.2 R12.2 ; 85.25,42.2 82.9,42.2 82.55,42.55 C5.1 ; 87.6,42.1 87.95,42.45 R13.2 v4(88.77,43.2) C6.2 ; 87.6,42.1 87.58,42.08 U2.16 87.58,36.78 86.5,35.7 80.9,35.7 79.95,34.75 R35.1 ; v4(109.4,40.1) R25.2
  BOTTOM w0.2: v4(109.4,40.1) 90.7,40.1 88.77,42.03 v4(88.77,43.2)
WAKE_UP: length 17.6
  TOP w0.2: D19.1 83.4,25.51 ; 83.4,25.51 82.99,25.1 79.35,25.1 78.7,25.75 SW2.1 ; 83.4,25.51 83.4,28.4 83.85,28.85 C16.1 RV1.1 86.3,29.9 86.8,30.4 87.7,30.4 88.23,30.93 U2.6
N00153: length 26.4
  TOP w0.2: C7.1 99.15,42.55 99.6,42.1 ; U2.13 89.53,40.27 89.5,40.3 ; 99.6,42.1 98.7,41.2 90.4,41.2 89.5,40.3 ; 99.6,42.1 101.75,42.1 101.95,42.3 R16.2 R17.2 103.15,42.35 103.4,42.1 105.7,42.1 105.95,42.35 C8.2 ; 89.5,40.3 88.88,39.68 U2.14
N01121: length 19.5
  TOP w0.2: R17.1 104.65,43.83 104.69,43.87 Q3.2 ; R4.1 107.52,46.52 105.83,44.83 Q3.2 ; Q3.2 104.69,45.81 104.2,46.3 102.5,46.3 101.53,47.27 D6.2
  TOP w1: TP4.1 107.5,53.82 107.52,53.8 R4.1
N02162: length 14.7
  TOP w0.2: U2.18 86.28,39.12 85.1,40.3 81.4,40.3 80,41.7 80,42.5 79.4,43.1 78.7,43.1 78.05,43.75 C9.1
  TOP w0.5: C2.2 C9.1 77.27,43.75 77.22,43.8 R10.2
N02176: length 13.7
  TOP w0.2: U2.19 85.63,38.91 84.73,39.8 81.2,39.8 79.45,41.55 79.45,42.4 79.25,42.6 78.9,42.6 78.55,42.25 C9.2
  TOP w0.5: C11.1 C9.2 77.27,42.25 77.12,42.1 R20.2
N02237: length 22.4
  TOP w0.5: R20.1 74.85,32.95 73.16,31.26 R34.1
  BOTTOM w2: RL1.3 45.59,20.69 48.02,23.12 R98.2
N02763: length 32
  TOP w0.2: D25.1 94.49,21.49 95,22 95,22.5 95.3,22.8 95.95,22.8 R60.2 R56.1
  TOP w0.3: v2(93.8,20.6) 93.8,21.48 D25.1 ; R92.2 v2(82.3,5.8)
  BOTTOM w0.3: v2(93.8,20.6) 93.2,20 88.7,20 87.9,19.2 87.9,16.7 89.5,15.1 89.5,13.8 87,11.3 87,6.8 86,5.8 v2(82.3,5.8)
N03241: length 34.3
  TOP w0.2: Q7.2 84.55,23.65 83.9,24.3 77.3,24.3 76.3,25.3 76.3,28.6 77,29.3 78.8,29.3 80.6,31.1 80.6,32.9 82.5,34.8 84.8,34.8 85.63,33.97 U2.2
N04366: length 6.6
  TOP w0.2: R46.2 81.9,32.9 83.1,34.1 84.3,34.1 84.98,33.42 U2.1
N05476: length 15.3
  TOP w0.38: 91.1,30.8 90.4,30.8 90.18,31.02 U2.9 ; 91.1,30.8 92.31,30.8 93.3,31.79 C14.1 ; 91.1,30.8 90.83,31.07 U2.10
  TOP w0.5: C14.1 96.39,31.79 97.15,32.55 R28.2
N06945: length 3.2
  TOP w0.38: D8.1 95.99,38.79 95.65,38.45 R28.1 R27.2
N07349: length 3.7
  TOP w0.2: C17.1 87.8,29.6 88.88,30.68 U2.7
N45632: length 1.9
  TOP w0.2: D19.2 88.26,25.51 88.3,25.55 R54.2
N60275: length 2.4
  TOP w0.2: U1.2 129.85,43.53 129.84,43.55 C4.2
N60407: length 9.9
  TOP w0.2: C4.1 128.2,46.72 128.21,46.73 D3.1 ; C4.1 127.51,45.05 126.47,44.01 L1.1 ; C4.1 128.95,45.05 129.81,44.19 U1.1
N60487: length 15.8
  TOP w0.2: R30.2 129.35,35.4 129.36,35.41 C13.2 130.79,37.51 130.2,38.1 130.2,39.54 130.43,39.77 R24.2 129.25,40.25 128.01,39.01 L1.2
N60523: length 3.4
  TOP w0.2: U1.7 135.84,43.53 136.3,44 136.3,44.55 136.5,44.75 C3.1
N60535: length 2.7
  TOP w0.2: R21.2 128.69,42.17 129.41,42.89 U1.3
N60543: length 6.5
  TOP w0.2: R22.2 136.98,40.25 137.01,40.28 R23.2 137.53,40.76 137.51,40.78 C10.1 136.45,41.75 135.97,42.23 U1.5
N60675: length 2.9
  TOP w0.2: R22.1 R24.1
N62346: length 5.2
  TOP w0.15: U3.44 117.95,31.31 119.05,32.41 R40.1
  TOP w0.2: R41.1 R40.1
N62530: length 17.9
  TOP w0.2: Y2.1 102.22,21.55 102.66,21.1 106,21.1 106.75,21.85 R58.2 109.13,22.73 112.05,25.65 U3.6
  TOP w0.4: Y2.1 101.53,22.27 100.97,22.83 C21.2
N62534: length 13.5
  TOP w0.2: U3.5 111.45,26.15 108.99,23.69 R58.1 106.25,23.69 105.62,24.32 Y2.3
  TOP w0.4: Y2.3 104.8,25.65 104.5,25.95 C20.2
N62538: length 9.2
  TOP w0.2: U3.4 112.55,26.65 111.23,27.97 C19.2 107.47,27.97 107.4,27.9 Y1.2
N62542: length 9.6
  TOP w0.2: U3.3 113.05,27.15 110.77,29.43 C15.2 107.47,29.43 107.34,29.3 Y1.1
N62840: length 13.5
  TOP w0.15: C23.2 105.93,19.93 106.6,20.6 108.6,20.6 113.15,25.15 U3.7
  TOP w0.2: C23.2 104.83,19.03 104.82,19.05 R62.1
N62876: length 8.5
  TOP w0.2: L2.2 110.58,19.03 110.58,19.03 C24.1 111.11,21.71 113.55,24.15 U3.9
N66854: length 27.2
  TOP w0.2: RL1.1 61.7,17.6 64.59,14.71 75.22,14.71 75.22,13.65 76.11,12.76 Q11.3 80.13,12.61 ; 80.13,12.61 Q12.3 ; 80.13,12.61 80.04,12.7 80,12.7 79.5,13.2 79.5,14.7
N66902: length 8.7
  TOP w0.3: Q13.3 83.81,12.61 82.6,11.4 80.4,11.4 79.65,10.65 Q12.1 79.65,9.36 80.11,8.9 R86.1
N72236: length 18.5
  TOP w0.2: 79.5,22.7 79.49,22.7 79.49,22.01 79.8,21.7 80.4,21.7 80.6,21.5 80.6,21.35 80.61,21.34 Q9.3 Q8.3 ; 75.22,22.71 75.22,22.33 76.11,21.45 Q8.3 ; RL1.2 75.62,20.7 75.63,20.71 Q8.3
N76887: length 8.8
  TOP w0.2: Q10.3 83.81,20.71 82.7,19.6 80.2,19.6 79.65,19.05 Q9.1 79.65,17.97 80.06,17.56 80.06,17.44 80.12,17.38 R66.1
N86420: length 9.5
  TOP w0.2: R70.1 102.89,14.01 103.5,13.4 103.5,11.5 103.05,11.05 102.29,11.05
  TOP w0.3: 102.29,11.05 102.29,10.11 103,9.4 103.8,9.4 104.2,9 J8.1
N86427: length 8.6
  TOP w0.2: R71.1 105.49,14.01 106,13.5 106,11.3 105.75,11.05 104.79,11.05
  TOP w0.3: 104.79,11.05 104.79,9.91 105.2,9.5 J8.2
N86434: length 8.7
  TOP w0.2: 107.19,11.05 107.95,11.05 108.4,11.5 108.4,13.5 107.89,14.01 R72.1
  TOP w0.3: J8.3 106.2,9.4 107.19,10.39 107.19,11.05
N86441: length 9.9
  TOP w0.2: R73.1 110.19,14.01 110.9,13.3 110.9,11.4 110.55,11.05 109.59,11.05
  TOP w0.3: 109.59,11.05 109.59,10.19 108.9,9.5 108.1,9.5 107.2,8.6 J8.4
N86910: length 1.3
  TOP w0.127: R47.2 127.66,29.4 127.67,29.39 D14.2
N86956: length 1.3
  TOP w0.127: R44.2 D12.2
N90859: length 8.1
  TOP w0.2: R88.1 117.29,9.07 116.99,9.37 U6.3 116.99,11.1 116.49,11.6 114.8,11.6 114.4,12 114.4,13.07 114.2,13.27 R75.2
N95637: length 18.1
  TOP w0.2: R75.1 R81.2 113.63,10.87 114.26,10.23 U6.1 115.08,9.37 114.5,8.8 114.5,8 115,7.5 123.7,7.5 124.7,8.5 U7.3
N97042: length 12.5
  TOP w0.2: R77.1 R82.2 v2(122.07,10.87) ; U8.3 v2(130.9,10.7)
  BOTTOM w0.2: v2(122.07,10.87) 123.43,10.87 123.8,10.5 129.6,10.5 129.8,10.7 v2(130.9,10.7)
N97046: length 21
  TOP w0.2: R76.1 v2(119.55,11.45) ; U8.5 131.55,12.79 132.24,12.1 v2(133,12.1) 134.2,12.1 134.91,12.81 U9.9
  BOTTOM w0.2: v2(133,12.1) 132.5,11.6 131.75,11.6 131.45,11.9 130.2,11.9 129.75,11.45 123.9,11.45 123.35,12 121.5,12 120.95,11.45 v2(119.55,11.45)
N98736: length 6.7
  TOP w0.2: R68.1 124.99,14.87 124.7,14.58 U7.6 124.7,12.79 124.7,12.79 124.7,12.1 125.93,10.87 R83.2
N98835: length 4.4
  TOP w0.2: R69.1 127.59,13.84 127.55,13.8 R78.2 127.07,13.27 126.82,13.52 U7.5
N100399: length 5.6
  TOP w0.2: U8.6 130.9,12.8 130.41,12.31 129.9,12.31 ; 129.9,12.31 R78.1 ; 129.9,12.31 130.25,12.66 U8.7
N101244: length 5.5
  TOP w0.2: R83.1 127.55,8.95 127.8,8.7 129.6,8.7 ; 129.6,8.7 129.6,8.7 U8.1 ; 129.6,8.7 130,8.7 130.25,8.95 U8.2
N105903: length 12.4
  TOP w0.2: U9.8 135.41,13.11 135.9,12.62 135.9,11.7 135.3,11.1 133.6,11.1 133.1,10.6 133.1,9.2 131.9,8 130.7,8 129.51,6.81 129.51,5.99
N105907: length 4.4
  TOP w0.2: U9.3 135.41,8.46 136.07,7.8 136.8,7.8 137.31,7.29 137.31,5.99
N105911: length 4.6
  TOP w0.2: 132.12,5.99 132.12,6.91 132.8,7.6 133.55,7.6 134.41,8.46 U9.1
N105915: length 3.3
  TOP w0.2: 134.72,5.99 134.72,7.81 134.91,8.01 U9.2
N115788: length 6.9
  TOP w0.2: C25.1 126.61,17.21 126.9,17.5 128.86,17.5 129.23,17.13 R64.2 ; C25.1 126.61,15.85 126.63,15.83 R69.2 ; C25.1 R63.1
N129705: length 7.6
  TOP w0.2: R56.2 94.45,25.45 94.11,25.11 Q7.3 94.11,23.11 93.6,22.6 92.1,22.6 91.79,22.29 D25.2
N129935: length 56.2
  TOP w0.5: R92.1 78.9,5.8 77.5,4.4 38.3,4.4 36.09,6.61 RL1.6
  BOTTOM w2: RL1.5 36.09,20.69 33.48,23.3 C30.2
N130360: length 4.5
  BOTTOM w2: C30.1 40.99,25.5 40.99,25.5 R98.1
N133152: length 5.8
  TOP w0.4: 93.9,14.61 93.9,15.58 94.2,15.88 U5.5 ; 93.9,14.61 93.9,13.64 94.2,13.34 U5.3 ; 93.9,14.61 U5.4
N133196: length 12.3
  TOP w0.2: U5.8 88.32,18.42 87.9,18 87.9,16.8 86.9,15.8 86.9,14.2 87.79,13.31 ; U5.13 88.33,12.07 87.79,12.61 87.79,13.31 ; U5.12 87.82,13.34 87.79,13.31
N137595: length 21.7
  TOP w0.2: 96.7,15.7 97.3,16.3 99.36,16.3 99.85,16.79 U4.4 ; 96.7,15.7 96.7,18.9 96,19.6 93.1,19.6 92.4,18.9 92.4,17.7 90.58,15.88 U5.10 ; 96.7,15.7 96.7,12.79 95.98,12.07 U5.2
N137612: length 9.8
  TOP w0.2: 98.55,15.22 98.55,14.59 97.5,13.54 97.5,12.5 96.8,11.8 96.8,11.3 ; 96.8,11.3 96.3,10.8 U5.1 ; 96.8,11.3 97.15,10.95 R80.1 R84.1
N137616: length 14
  TOP w0.2: 99.2,15.22 99.2,14.2 v1(99.2,14.2) 98.71,13.71 R74.1 R79.1 ; U5.9 v1(90.8,17.15)
  BOTTOM w0.2: v1(90.8,17.15) 93.15,17.15 96.1,14.2 v1(99.2,14.2)
N140319: length 3.3
  TOP w0.5: R4.2 112.52,48.87 112.11,48.47 Q4.3
N140441: length 26.2
  TOP w0.2: U2.12 90.18,39.38 91.4,40.6 106.4,40.6 107.9,42.1 ; 107.9,42.1 110,42.1 110.25,42.35 R18.2 R19.2 ; 107.9,42.1 107.45,42.55 C8.1
N140869: length 4.3
  TOP w0.2: Q4.1 110.57,44.83 110.1,45.3 109.86,45.3 109.77,45.21 D7.1 109.39,44.96 108.75,44.32 R18.1
N142766: length 3.3
  TOP w0.5: Q3.3 103.72,48.4 104.02,48.71 R3.2
N142773: length 19.3
  TOP w0.2: D5.2 93.43,47.27 94.4,46.3 95.8,46.3 96.3,45.8 96.3,45.79 96.39,45.7 Q2.2 ; Q2.2 96.39,43.97 96.45,43.91 R15.1 ; Q2.2 97.43,44.83 99.02,46.42 R3.1
  TOP w1: TP3.1 99,53.82 99.02,53.8 R3.1
N142879: length 4.3
  TOP w0.2: Q3.1 102.07,44.83 101.6,45.3 101.39,45.3 101.37,45.27 D6.1 100.99,44.65 100.9,44.56 100.9,44.4 100.45,43.95 R16.1
N143225: length 4.2
  TOP w0.2: Q2.1 93.99,44.83 93.55,45.27 D5.1 92.79,44.65 92.7,44.56 92.7,44.5 92.25,44.05 R14.1
N143454: length 16.4
  TOP w0.2: C6.1 91.05,42.2 ; 91.05,42.2 91,42.2 90.7,41.9 89.6,41.9 88.23,40.53 U2.15 ; 91.05,42.2 93.5,42.2 93.75,42.45 R14.2 R15.2 94.95,42.45 95.3,42.1 97.3,42.1 97.65,42.45 C7.2
N144047: length 3.2
  TOP w0.5: Q2.3 95.42,48.55 95.52,48.66 R2.2
N144054: length 20.4
  TOP w0.2: Q1.2 89.13,44.83 90.52,46.22 R2.1 ; Q1.2 87.9,44.84 87.9,45.8 87.4,46.3 85.6,46.3 84.63,47.27 D4.2 ; Q1.2 87.89,44.45 87.24,43.8 86.7,43.8 86.45,43.55 R13.1
  TOP w1: TP2.1 90.5,53.82 90.52,53.8 R2.1
N144202: length 4.2
  TOP w0.2: R12.1 83.75,43.95 84.19,44.39 D4.1 85.03,45.27 85.47,44.83 Q1.1
N144572: length 9.3
  TOP w0.2: Q1.3 86.16,47.54 85.3,48.4 83,48.4 82.3,47.7 R9.1
  TOP w0.5: R1.2 87.02,48.51 86.92,48.4 Q1.3
N144615: length 12.7
  TOP w0.2: U2.17 86.93,39.67 85.3,41.3 82,41.3 81.05,42.25 C5.2 81.05,44.05 81.4,44.4 82,44.4 82.3,44.7 R9.2
N146314: length 2.1
  TOP w0.2: SW2.2 78.7,33.25 78.1,33.85 78.1,34.24 78.13,34.27 R35.2
N155464: length 14.8
  TOP w0.3: SW1.1 106.7,37.3 107.25,37.85 109.03,37.85 109.5,38.31 Q5.3 113,38.31 113.7,37.61 113.7,36.2 114.18,35.72 Q6.1 114.95,34.75 114.75,34.55 R37.1 R38.1
N155472: length 27.9
  TOP w0.2: U1.6 v2(136.4,42.89) 137.06,43.55 R11.2
  TOP w0.3: Q6.3 v2(116.8,38.31)
  BOTTOM w0.3: v2(116.8,38.31) 117.71,37.4 134.3,37.4 136.4,39.5 v2(136.4,42.89)
N155484: length 10.9
  TOP w0.2: Q6.2 116.85,36.35 116.6,36.6 115.7,36.6 114.7,37.6 114.7,39.12 115.05,39.47 R26.1 R25.1
  TOP w0.3: Q6.2 116.85,34.93 117.45,34.33 R38.2
N160866: length 9.3
  TOP w0.3: D11.1 D10.1 107.39,33.69 107.85,34.15 R36.2 110.93,34.63 110.55,35.01 Q5.1
N160870: length 2
  TOP w0.3: D11.2 103.06,31.59 103.04,31.61 R45.1
N160997: length 2
  TOP w0.3: R39.1 103.04,33.71 103.06,33.69 D10.2
N162969: length 1.2
  TOP w0.4: D15.2 92.77,27.63 92.75,27.61 R51.1
N169622: length 25
  TOP w0.2: R43.1 123.25,34.95 121.9,36.3 120,36.3 119,37.3 119,45.3 120.1,46.4 122.8,46.4 123.95,47.55 D2.1 123.95,49.95 124.7,50.7 J1.1
N240697: length 3.9
  TOP w0.2: 80.13,7.15 D33.2 78.75,7.15 77.55,5.95 R91.1
N241926: length 24.4
  TOP w0.2: RL1.7 55.7,9.8 71.8,9.8 74.45,7.15 R89.1
N244503: length 8.6
  TOP w0.2: J4.1 v2(132.77,21.7) ; R61.1 128.35,21.55 128.62,21.28 v2(128.62,21.1) 128.62,20.61 128.89,20.33 128.9,20.33 129.03,20.21 D26.1
  BOTTOM w0.2: v2(128.62,21.1) 129.5,21.1 130.1,21.7 v2(132.77,21.7)
N244510: length 7.8
  TOP w0.2: R59.1 128.55,22.75 v2(128.6,22.7) 129.29,22.01 D24.1 ; J4.2 v2(132.4,22.7)
  BOTTOM w0.2: v2(128.6,22.7) v2(132.4,22.7)
N244517: length 7.7
  TOP w0.2: D20.1 129.36,23.81 129.36,23.8 128.8,23.8 128.65,23.95 v2(128.5,23.95) R57.1 ; J4.3 v2(132.77,23.7)
  BOTTOM w0.2: v2(128.5,23.95) 130.45,23.95 130.7,23.7 v2(132.77,23.7)
N244530: length 7.9
  TOP w0.2: R55.1 v2(128.5,25.15) 128.96,25.61 D18.1 ; J4.4 v2(132.4,24.7)
  BOTTOM w0.2: v2(132.4,24.7) 130.9,24.7 130.45,25.15 v2(128.5,25.15)
N244543: length 8.5
  TOP w0.2: D16.1 129.11,27.41 128.85,27.15 128.85,26.7 v2(128.5,26.35) R53.1 ; J4.5 v2(132.77,25.7)
  BOTTOM w0.2: v2(132.77,25.7) 131.2,25.7 130.55,26.35 v2(128.5,26.35)
N244556: length 9.1
  TOP w0.2: J4.6 v2(132.4,26.7) ; D13.1 129.11,29.21 128.6,28.7 v2(128.6,28.2) 127.95,27.55 R52.1
  BOTTOM w0.2: v2(132.4,26.7) 131.6,26.7 130.1,28.2 v2(128.6,28.2)

## Copper pours and planes (outline as drawn; the poured copper is in the pictures)
GND on TOP (solid shape): 72.17,52.71 28.15,52.71 28.15,36.35 3.35,36.35 3.35,56.65 72.17,56.65
VDD168 on TOP (solid shape): 168.75,2.85 143.95,2.85 143.95,30.11 150.69,30.11 150.69,29.9 150.7,29.7 150.71,29.49 150.74,29.29 150.77,29.08 150.81,28.88 150.86,28.68 150.91,28.48 150.97,28.28 151.04,28.09 151.12,27.9 151.21,27.71 151.3,27.53 151.4,27.35 151.51,27.17 151.62,27 151.74,26.83 151.87,26.67 152,26.51 152.14,26.36 152.28,26.21 152.43,26.07 152.59,25.94 152.75,25.81 152.91,25.68 153.08,25.57 153.26,25.46 153.43,25.35 153.62,25.26 153.8,25.17 153.99,25.09 154.18,25.01 154.38,24.95 154.58,24.89 154.78,24.84 154.98,24.79 155.18,24.76 155.38,24.73 155.59,24.71 155.79,24.7 156,24.69 156.21,24.7 156.41,24.71 156.62,24.73 156.82,24.76 157.02,24.79 157.22,24.84 157.42,24.89 157.62,24.95 157.82,25.01 158.01,25.09 158.2,25.17 158.38,25.26 158.57,25.35 158.74,25.46 158.92,25.57 159.09,25.68 159.25,25.81 159.41,25.94 159.57,26.07 159.72,26.21 159.86,26.36 160,26.51 160.13,26.67 160.26,26.83 160.38,27 160.49,27.17 160.6,27.35 160.7,27.53 160.79,27.71 160.88,27.9 160.96,28.09 161.03,28.28 161.09,28.48 161.14,28.68 161.19,28.88 161.23,29.08 161.26,29.29 161.29,29.49 161.3,29.7 161.31,29.9 161.31,30 161.31,30.11 161.3,30.31 161.29,30.52 161.26,30.72 161.23,30.93 161.19,31.13 161.14,31.33 161.09,31.53 161.03,31.72 160.96,31.92 160.88,32.11 160.79,32.3 160.7,32.48 160.6,32.66 160.49,32.84 160.38,33.01 160.26,33.18 160.13,33.34 160,33.5 159.86,33.65 159.72,33.8 159.57,33.94 159.41,34.07 159.25,34.2 159.09,34.33 158.92,34.44 158.74,34.55 158.57,34.65 158.38,34.75 158.2,34.84 158.01,34.92 157.82,35 157.62,35.06 157.42,35.12 157.22,35.17 157.02,35.22 156.82,35.25 156.62,35.28 156.41,35.3 156.21,35.31 156,35.32 155.79,35.31 155.59,35.3 155.38,35.28 155.18,35.25 154.98,35.22 154.78,35.17 154.58,35.12 154.38,35.06 154.18,35 153.99,34.92 153.8,34.84 153.62,34.75 153.43,34.65 153.26,34.55 153.08,34.44 152.91,34.33 152.75,34.2 152.59,34.07 152.43,33.94 152.28,33.8 152.14,33.65 152,33.5 151.87,33.34 151.74,33.18 151.62,33.01 151.51,32.84 151.4,32.66 151.3,32.48 151.21,32.3 151.12,32.11 151.04,31.92 150.97,31.72 150.91,31.53 150.86,31.33 150.81,31.13 150.77,30.93 150.74,30.72 150.71,30.52 150.7,30.31 150.69,30.11 143.95,30.11 143.95,56.65 168.75,56.65
N02237 on TOP (solid shape): 72.17,29.71 47.59,29.71 47.59,7.69 43.59,7.69 43.59,29.71 33.07,29.71 33.07,32.81 72.17,32.81
N129935 on TOP (solid shape): 38.09,7.69 28.15,7.69 28.15,2.85 3.35,2.85 3.35,23.15 38.09,23.15
N232879 on TOP (solid shape): 72.17,37.71 33.07,37.71 33.07,47.81 72.17,47.81
